# EAGLE board Transmitter_Final (EAGLE 8.4.0)
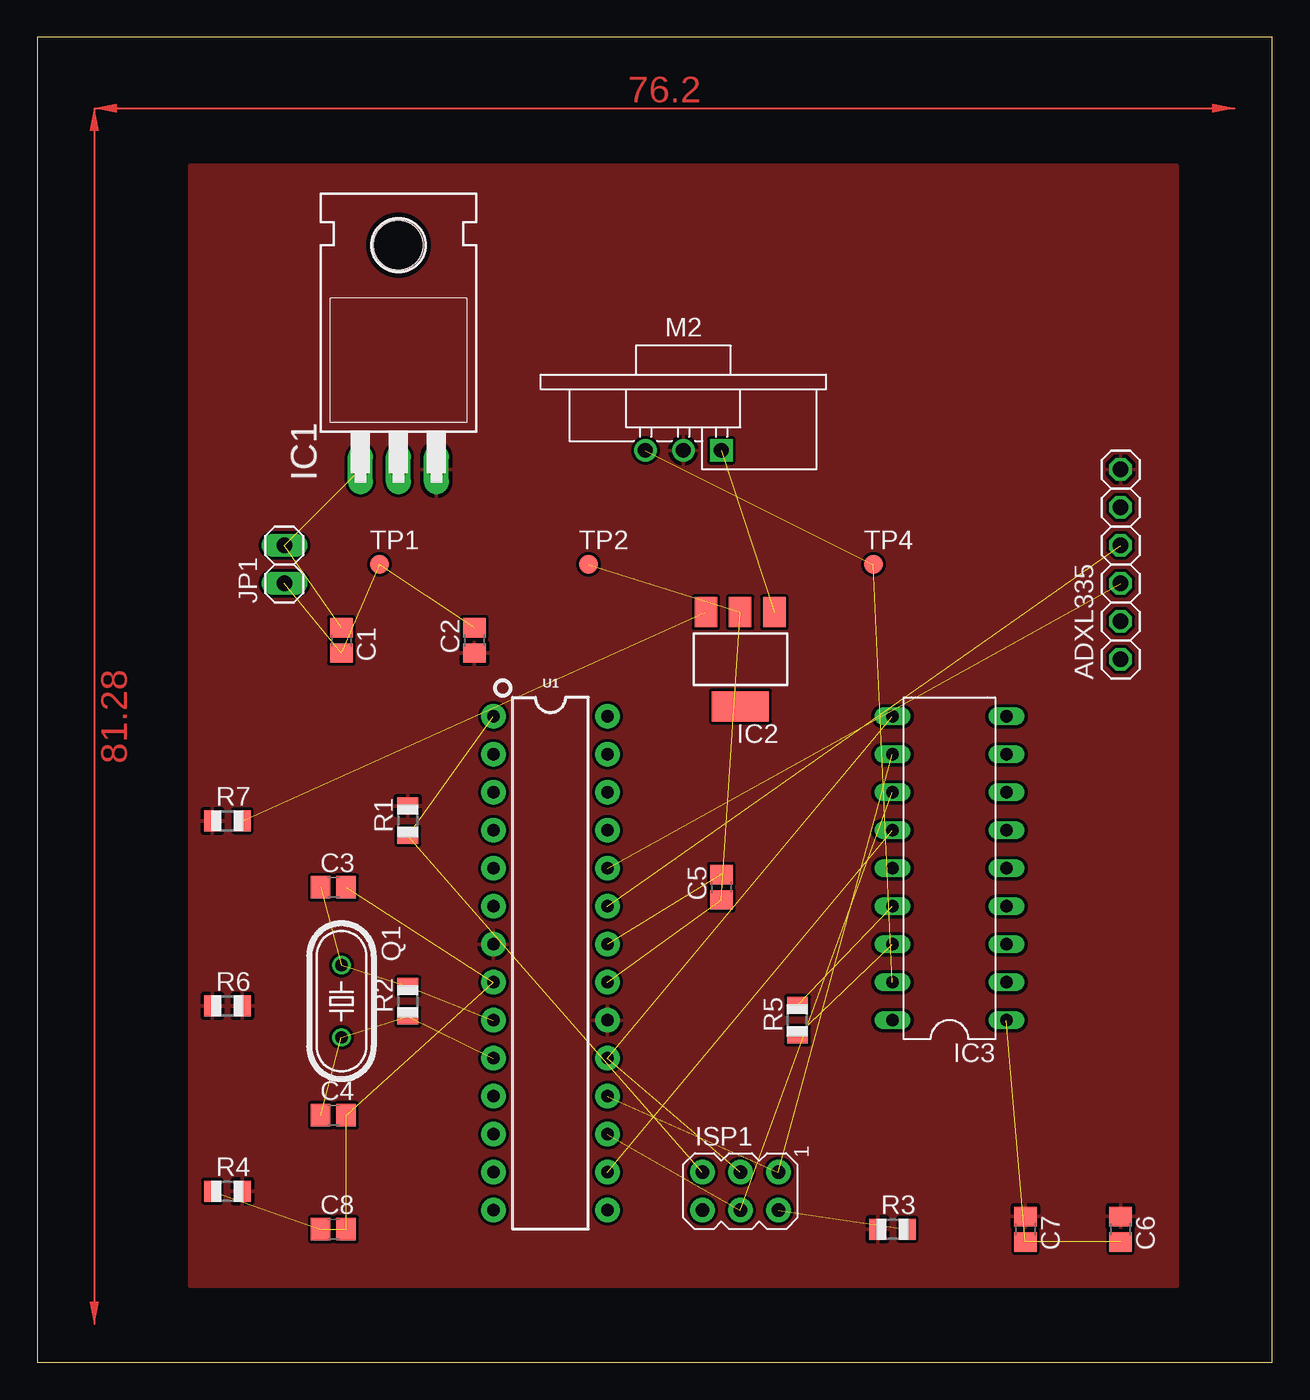
[diagram p0: board, top side]
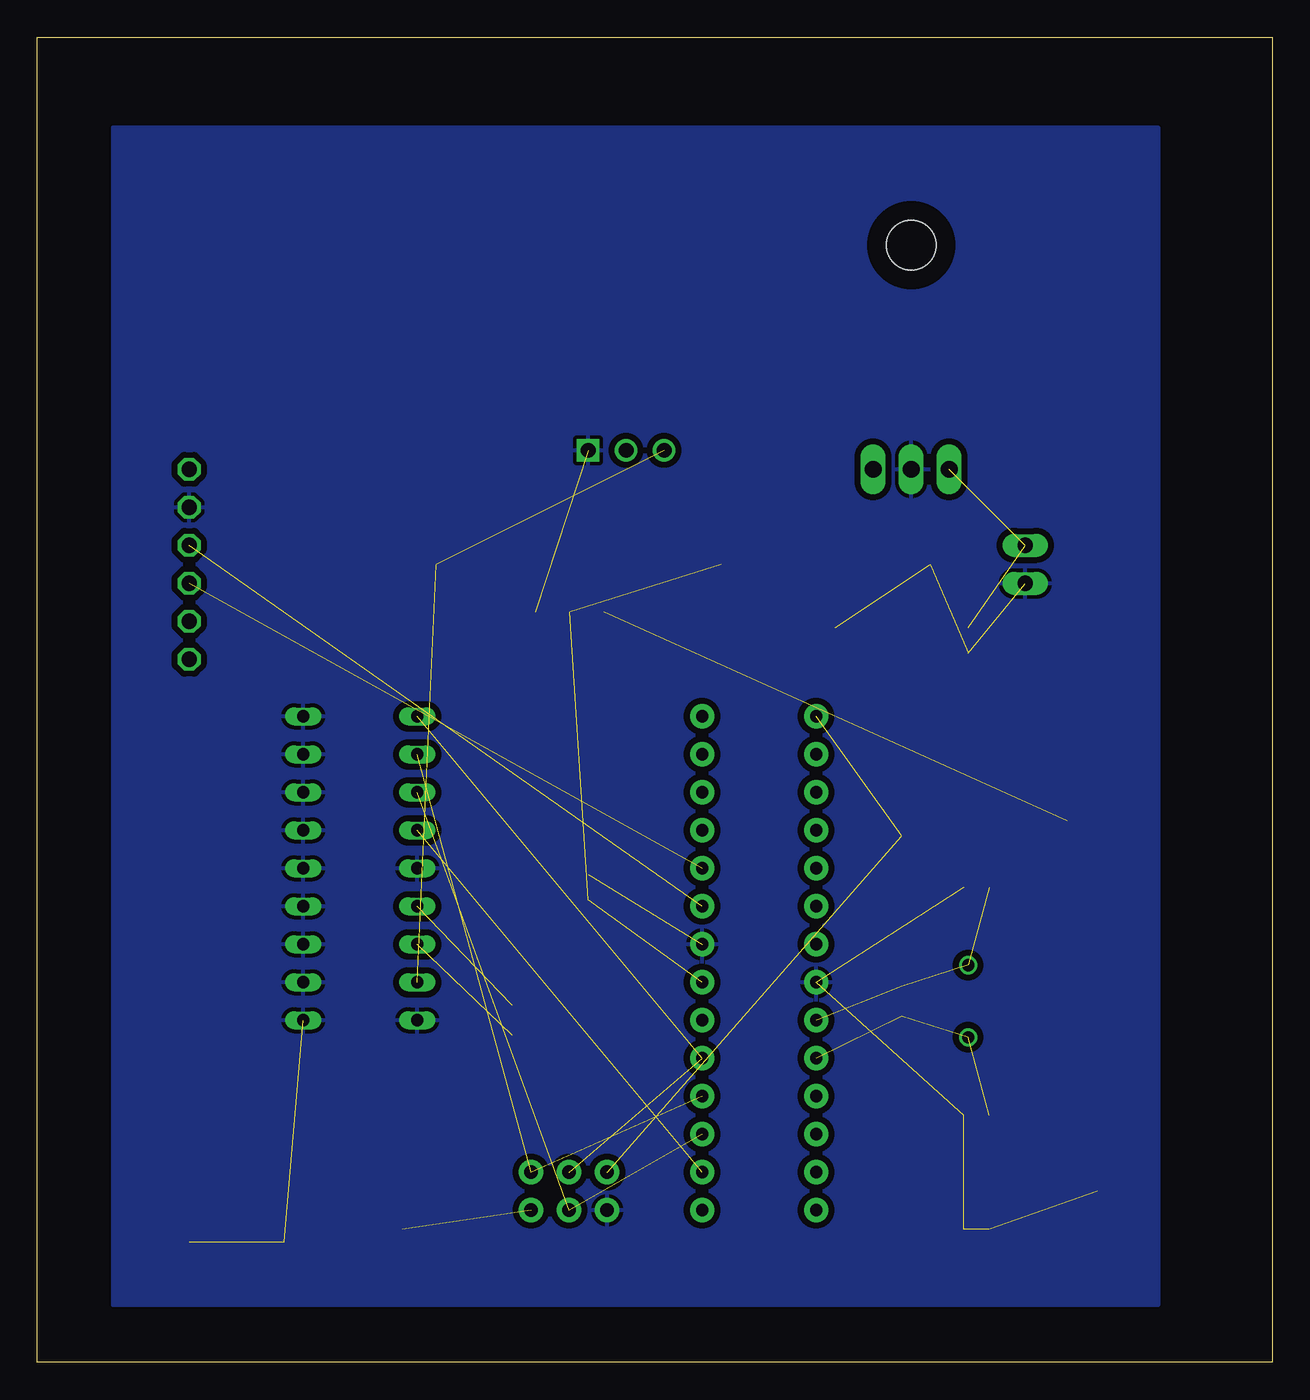
[diagram p1: board, bottom side, seen from below]

Size 82.53 x 88.57 mm. Coordinates in mm from the lower left corner, seen from the top.
Outline: 0,0 82.53,0 82.53,88.57 0,88.57 0,0
Copper layers (1*16): Top 0.0178mm / dielectric 59mil / Bottom 0.0178mm
Design rules "drc": minimum track width 7mil, minimum drill 16mil, track to track 7mil, track to pad 7mil, pad to pad 7mil, via to via 7mil, smd to smd 7mil, copper to edge 20mil, drill to drill 16mil, minimum pad ring 8mil, minimum via ring 8mil, stop-mask expansion 3mil, vias tented up to drill 0mil, thermal gap 10mil
Net classes: 0 default: width 0.178 mm, drill 0.406 mm, clearance 0.203 mm

## Footprints (pad centres in the part's own frame; a part is rotated, then mirrored left to right if it is on the bottom)
1X06 = drill 1.016 octagon: 1 -6.35,0; 2 -3.81,0; 3 -1.27,0; 4 1.27,0; 5 3.81,0; 6 6.35,0
C0805 = smd 1.3 x 1.5: 1 -0.85,0; 2 0.85,0
TO220H = drill 1.118 long: 1 -2.54,-10.16; 2 0,-10.16; 3 2.54,-10.16 | hole 3.302: 0,4.826
SOT223 = smd 1.499 x 2.007: 1 -2.261,-3.15; 2 0.025,-3.15; 3 2.311,-3.15 | smd 3.81 x 2.007: 4 0,3.15
18-DIP-A = drill 0.813 long: 1 -10.16,-3.81; 2 -7.62,-3.81; 3 -5.08,-3.81; 4 -2.54,-3.81; 5 0,-3.81; 6 2.54,-3.81; 7 5.08,-3.81; 8 7.62,-3.81; 9 10.16,-3.81; 10 10.16,3.81; 11 7.62,3.81; 12 5.08,3.81; 13 2.54,3.81; 14 0,3.81; 15 -2.54,3.81; 16 -5.08,3.81; 17 -7.62,3.81; 18 -10.16,3.81
AVRISP = drill 0.9 pad 1.626: 1 -1.27,2.54; 2 1.27,2.54; 3 -1.27,0; 4 1.27,0; 5 -1.27,-2.54; 6 1.27,-2.54
1X02 = drill 1.016 long: 1 -1.27,0; 2 1.27,0
WIRELESS-XY-FST#V = drill 1 square: 1 2.54,0 | drill 1: 2 0,0; 3 -2.54,0
HC49/S = drill 0.813: 1 -2.413,0; 2 2.413,0
R0805 = smd 1.1 x 1.4: 1 -1,0; 2 1,0
B1,27 = smd 1.27 x 1.27: TP 0,0
DIP28 = drill 0.813 pad 1.626: 1 -16.51,-3.81; 2 -13.97,-3.81; 3 -11.43,-3.81; 4 -8.89,-3.81; 5 -6.35,-3.81; 6 -3.81,-3.81; 7 -1.27,-3.81; 8 1.27,-3.81; 9 3.81,-3.81; 10 6.35,-3.81; 11 8.89,-3.81; 12 11.43,-3.81; 13 13.97,-3.81; 14 16.51,-3.81; 15 16.51,3.81; 16 13.97,3.81; 17 11.43,3.81; 18 8.89,3.81; 19 6.35,3.81; 20 3.81,3.81; 21 1.27,3.81; 22 -1.27,3.81; 23 -3.81,3.81; 24 -6.35,3.81; 25 -8.89,3.81; 26 -11.43,3.81; 27 -13.97,3.81; 28 -16.51,3.81

## Placement (x,y rotation side)
ADXL335  [1X06]  72.39,53.34 90 top
C1  0.1u  [C0805]  20.32,48.26 270 top
C2  0.1u  [C0805]  29.21,48.26 90 top
C3  22p  [C0805]  19.78,31.75 0 top
C4  22p  [C0805]  19.78,16.51 0 top
C5  10u  [C0805]  45.72,31.75 90 top
C6  0.1u  [C0805]  72.39,8.89 270 top
C7  0.1u  [C0805]  66.04,8.89 270 top
C8  0.1u  [C0805]  19.78,8.89 0 top
IC1  7805T  [TO220H]  24.13,69.85 0 top
IC2  REG1117  [SOT223]  46.99,46.99 180 top
IC3  HT12E"  [18-DIP-A]  60.96,33.02 90 top
ISP1  AVRISP-6  [AVRISP]  46.99,11.43 270 top
JP1  [1X02]  16.51,53.34 90 top
M2  WIRELESS-XY-FST#V  [WIRELESS-XY-FST#V]  43.18,60.96 0 top
Q1  16MHz  [HC49/S]  20.32,24.13 270 top
R1  10k  [R0805]  24.77,36.2 90 top
R2  1M  [R0805]  24.77,24.13 90 top
R3  10k  [R0805]  57.15,8.89 0 top
R4  10k  [R0805]  12.7,11.43 0 top
R5  750K  [R0805]  50.8,22.86 90 top
R6  10k  [R0805]  12.7,23.81 0 top
R7  10k  [R0805]  12.7,36.2 0 top
TP1  TPB1,27  [B1,27]  22.86,53.34 0 top
TP2  TPB1,27  [B1,27]  36.83,53.34 0 top
TP4  TPB1,27  [B1,27]  55.88,53.34 0 top
U1  328P  [DIP28]  34.29,26.67 270 top

## Library data of the parts
ADXL335 C1-C8 ISP1 R1-R7 = adafruit
IC1 = linear
IC2 = burr-brown; MPN: REG1117; OC_FARNELL: 1097566; OC_NEWARK: 14P6981
IC3 = holtek
JP1 = pinhead
M2 = diy-modules
Q1 = crystal
TP1 TP2 TP4 = testpad
U1 = SparkFun-IC-Microcontroller; PROD_ID: IC-09136

## Nets
+5V: ADXL335.6 C2.1 C6.1 C7.1 IC1.3 M2.2 R1.2 R3.1 R4.2 R6.1 R6.2 R7.1 U1.7 U1.20
AD08: IC3.10 ISP1.3 U1.19
AREF: C5.1 IC2.2 TP2.TP U1.21
N$1: C3.1 Q1.1 R2.2 U1.9
N$2: IC3.11 ISP1.1 U1.18
N$3: ADXL335.4 U1.23
N$4: C4.1 Q1.2 R2.1 U1.10
N$5: IC3.16 R5.1
N$6: IC3.15 R5.2
N$7: ISP1.2 R3.2
N$8: IC3.13 U1.16
N$9: IC3.12 ISP1.4 U1.17
N$10: IC2.3 R7.2
N$11: ADXL335.3 U1.24
N$13: IC3.17 M2.3 TP4.TP
N$14: ADXL335.5 C1.2 C2.2 C3.2 C4.2 C5.2 C6.2 C7.2 C8.1 C8.2 IC1.2 IC2.1 IC3.1 IC3.2 IC3.3 IC3.4 IC3.5 IC3.6 IC3.7 IC3.8 IC3.9 IC3.14 IC3.18 ISP1.6 JP1.1 M2.1 R4.1 TP1.TP U1.8 U1.22
RESET: ISP1.5 R1.1 U1.1
VCC: C1.1 IC1.1 JP1.2

## Tracks (layer width: path | path; a pad name or v marks a point on that pad's centre or on a via)
+5V
  pour Top: 10.16,80.01 10.16,5.08 76.2,5.08 76.2,80.01 73.66,80.01
AD08  (2 unrouted)
AREF  (3 unrouted)
N$1  (3 unrouted)
N$2  (2 unrouted)
N$3  (1 unrouted)
N$4  (3 unrouted)
N$5  (1 unrouted)
N$6  (1 unrouted)
N$7  (1 unrouted)
N$8  (1 unrouted)
N$9  (2 unrouted)
N$10  (1 unrouted)
N$11  (1 unrouted)
N$13  (2 unrouted)
N$14  (12 unrouted)
  pour Bottom (isolate 0.406): 7.62,80.01 7.62,3.81 76.2,3.81 77.47,3.81 77.47,82.55 7.62,82.55
RESET  (2 unrouted)
VCC  (2 unrouted)
(copper drawn outside any net)
  shapes: Top area x2